# EAGLE board Landing Gear Layout (EAGLE 9.5.1)
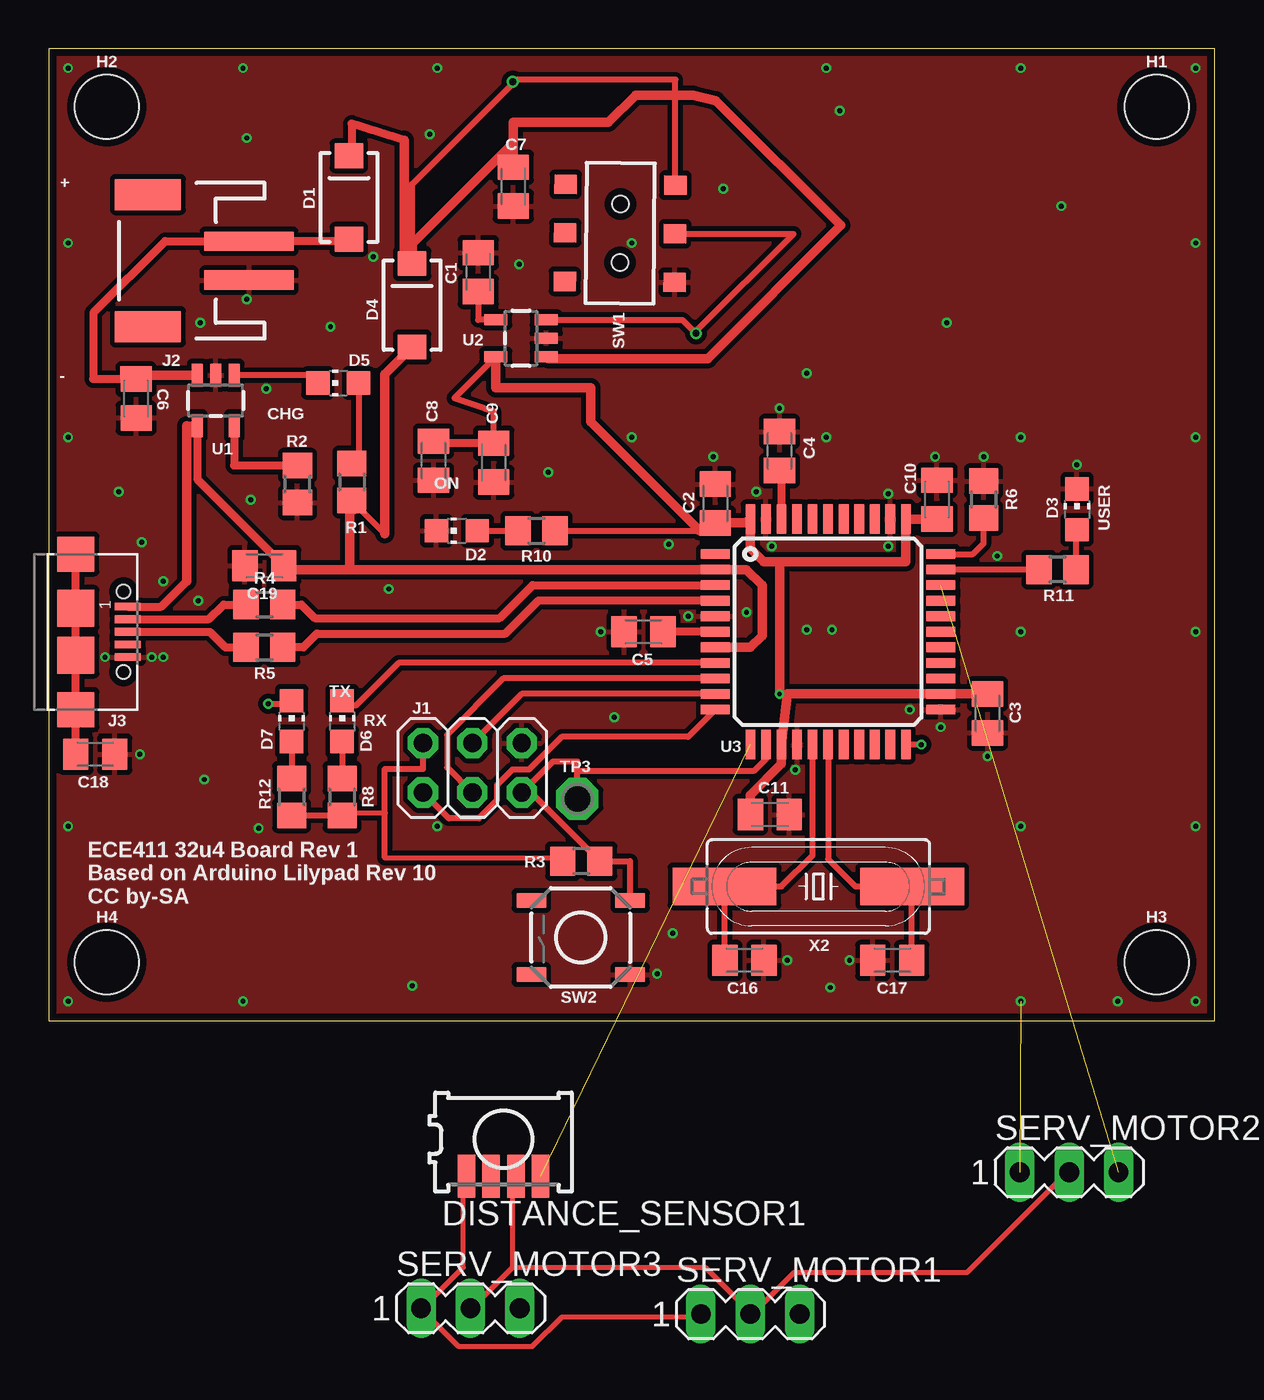
[diagram p0: board, top side]
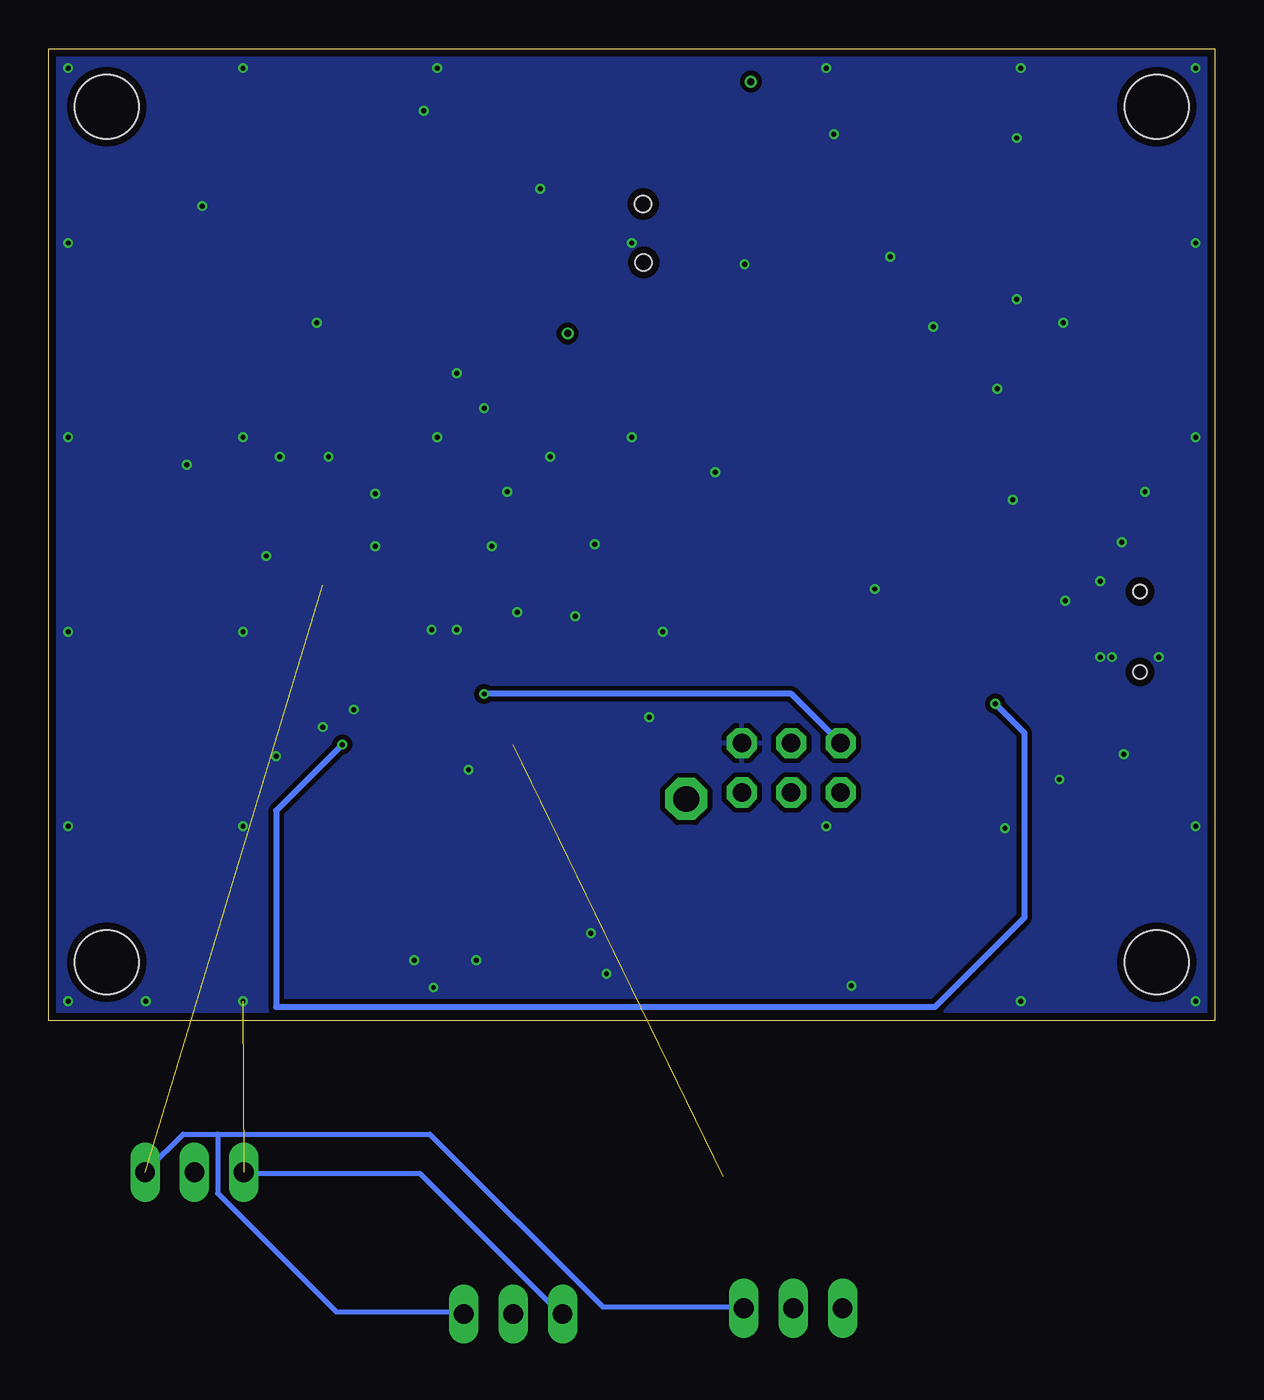
[diagram p1: board, bottom side, seen from below]

Size 60 x 50 mm. Coordinates in mm from the lower left corner, seen from the top.
Outline: 0,0 60,0 60,50 0,50 0,0
Copper layers (1*16): Top 0.035559375mm / dielectric 1.6mm / Bottom 0.035559375mm
Design rules "oshpark-2layer": minimum track width 6mil, minimum drill 10mil, track to track 6mil, track to pad 6mil, pad to pad 6mil, via to via 6mil, smd to smd 6mil, copper to edge 15mil, drill to drill 6mil, minimum pad ring 5mil, minimum via ring 5mil, stop-mask expansion 2.5mil, vias tented up to drill 0mil, thermal gap 10mil
Net classes: 0 default: width 0.254 mm, clearance 0.254 mm; 1 power: width 0.61 mm, drill 0.61 mm, clearance 0.254 mm

## Footprints (pad centres in the part's own frame; a part is rotated, then mirrored left to right if it is on the bottom)
C0805K = smd 1.3 x 1.6: 1 -1,0; 2 1,0
SMA-DIODE = smd 1.27 x 1.47: A -2.15,0; C 2.15,0
CHIP-LED0805 = smd 1.2 x 1.2: A 0,-1.05; C 0,1.05
TSSP6P38 = smd 0.9 x 2.2: 1 -1.905,-1.905; 2 -0.635,-1.905; 3 0.635,-1.905; 4 1.905,-1.905
STAND-OFF = hole 3.302: 0,0
2X03 = drill 0.95 pad 1.55 octagon: 1 -2.54,-1.27; 2 -2.54,1.27; 3 0,-1.27; 4 0,1.27; 5 2.54,-1.27; 6 2.54,1.27
JST-2-SMD = smd 1 x 4.6: 1 -1,-3.7; 2 1,-3.7 | smd 1.6 x 3.4: NC1 -3.4,1.5; NC2 3.4,1.5
629105136821 = smd 0.4 x 1.35: 1 -1.3,2.675; 2 -0.65,2.675; 3 0,2.675; 4 0.65,2.675; 5 1.3,2.675 | smd 1.8 x 1.9: SHELL -4,0; SHELL3 4,0 | smd 1.9 x 1.9: SHELL1 -1.2,0; SHELL2 1.2,0 | hole 0.7: -2.075,2.45; 2.075,2.45
R0805 = smd 1.3 x 1.5: 1 -0.95,0; 2 0.95,0
MA03-1 = drill 1.016 long: 1 -2.54,0; 2 0,0; 3 2.54,0
AYZ0202 = smd 1 x 1.15: 1 -2.5,2.825; 2 0,2.825; 3 2.5,2.825; 4 -2.5,-2.825; 5 0,-2.825; 6 2.5,-2.825 | hole 0.85: 1.5,0; -1.5,0
TACTILE_SWITCH_SMD = smd 1.524 x 0.762: 1 -2.54,1.905; 2 2.54,1.905; 3 -2.54,-1.905; 4 2.54,-1.905
P1-13 = drill 1.321 pad 2.159 octagon: TP 0,0
SOT23-5 = smd 0.55 x 1.2: 1 -0.95,-1.3; 2 0,-1.3; 3 0.95,-1.3; 4 0.95,1.3; 5 -0.95,1.3
TQFP44 = smd 1.5 x 0.5: 1 -5.8,4; 2 -5.8,3.2; 3 -5.8,2.4; 4 -5.8,1.6; 5 -5.8,0.8; 6 -5.8,0; 7 -5.8,-0.8; 8 -5.8,-1.6; 9 -5.8,-2.4; 10 -5.8,-3.2; 11 -5.8,-4; 23 5.8,-4; 24 5.8,-3.2; 25 5.8,-2.4; 26 5.8,-1.6; 27 5.8,-0.8; 28 5.8,0; 29 5.8,0.8; 30 5.8,1.6; 31 5.8,2.4; 32 5.8,3.2; 33 5.8,4 | smd 0.5 x 1.5: 12 -4,-5.8; 13 -3.2,-5.8; 14 -2.4,-5.8; 15 -1.6,-5.8; 16 -0.8,-5.8; 17 0,-5.8; 18 0.8,-5.8; 19 1.6,-5.8; 20 2.4,-5.8; 21 3.2,-5.8; 22 4,-5.8; 34 4,5.8; 35 3.2,5.8; 36 2.4,5.8; 37 1.6,5.8; 38 0.8,5.8; 39 0,5.8; 40 -0.8,5.8; 41 -1.6,5.8; 42 -2.4,5.8; 43 -3.2,5.8; 44 -4,5.8
HC49UP = smd 5.334 x 1.93: 1 -4.826,0; 2 4.826,0

## Placement (x,y rotation side)
C1  470p  [C0805K]  22.1,38.5 90 top
C2  100n  [C0805K]  34.3,26.6 90 top
C3  100n  [C0805K]  48.3,15.8 270 top
C4  100n  [C0805K]  37.6,29.3 90 top
C5  1u  [C0805K]  30.6,20 180 top
C6  4.7u  [C0805K]  4.5,32 270.2 top
C7  4.7u  [C0805K]  23.9,42.9 270 top
C8  4.7u  [C0805K]  19.8,28.8 270 top
C9  100n  [C0805K]  22.9,28.7 270 top
C10  100n  [C0805K]  45.7,26.8 90 top
C11  100n  [C0805K]  37.1,10.6 0 top
C16  30p  [C0805K]  35.8,3.1 0 top
C17  30p  [C0805K]  43.4,3.1 180 top
C18  100n  [C0805K]  2.4,13.7 0 top
C19  4.7u  [C0805K]  11.1,23.4 180 top
D1  B340A  [SMA-DIODE]  15.45,42.34 90 top
D2  GREEN  [CHIP-LED0805]  21,25.2 90 top
D3  GREEN  [CHIP-LED0805]  52.9,26.3 0 top
D4  B340A  [SMA-DIODE]  18.7,36.8 90 top
D5  GREEN  [CHIP-LED0805]  14.9,32.8 90 top
D6  GREEN  [CHIP-LED0805]  15.1,15.4 0 top
D7  GREEN  [CHIP-LED0805]  12.5,15.4 0 top
DISTANCE_SENSOR1  [TSSP6P38]  23.4,-6.1 0 top  (outside the outline)
H1  STAND-OFF  [STAND-OFF]  57,47 0 top
H2  STAND-OFF  [STAND-OFF]  3,47 0 top
H3  STAND-OFF  [STAND-OFF]  57,3 0 top
H4  STAND-OFF  [STAND-OFF]  3,3 0 top
J1  3x2 M  [2X03]  21.8,13 0 top
J2  S2B-PH-SM4-TB(LF)(SN)  [JST-2-SMD]  6.61,39.09 90 top
J3  629105136821  [629105136821]  1.4,20 270 top
R1  1K  [R0805]  15.6,27.7 270 top
R2  10K  [R0805]  12.8,27.6 90 top
R3  10K  [R0805]  27.4,8.2 180 top
R4  22  [R0805]  11.1,21.4 0 top
R5  22  [R0805]  11.1,19.2 0 top
R6  10K  [R0805]  48.1,26.8 270 top
R8  1K  [R0805]  15.1,11.5 270 top
R10  1K  [R0805]  25.1,25.2 0 top
R11  1K  [R0805]  51.9,23.2 180 top
R12  1K  [R0805]  12.5,11.5 270 top
SERV_MOTOR1  [MA03-1]  36.1,-15.1 0 top  (outside the outline)
SERV_MOTOR2  [MA03-1]  52.5,-7.8 0 top  (outside the outline)
SERV_MOTOR3  [MA03-1]  21.7,-14.8 0 top  (outside the outline)
SW1  AYZ0202AGRLC  [AYZ0202]  29.4,40.5 269.5 top
SW2  !RESET  [TACTILE_SWITCH_SMD]  27.37,4.27 180 top
TP3  TPPAD1-13  [P1-13]  27.2,11.4 0 top
U1  MCP73831  [SOT23-5]  8.6,31.9 180 top
U2  MIC5219  [SOT23-5]  24.3,35.1 90 top
U3  ATMEGA32U4-AUR  [TQFP44]  40.1,20 0 top
X2  16 MHz  [HC49UP]  39.6,6.9 0 top

## Library data of the parts
C1 = rcl; DESC: CAP CER 470PF 50V X7R 0805; MFR: Samsung; MPN: CL21B471KBANNNC; SPICEPREFIX: C
C2-C4 C9-C11 C18 = rcl; DESC: CAP CER 0.1UF 50V X7R 0805; MFR: Samsung; MPN: CL21B104KBCNNNC; SPICEPREFIX: C
C5 = rcl; DESC: CAP CER 1UF 16V X7R 0805; MFR: Samsung; MPN: CL21B105KOFNNNG; SPICEPREFIX: C
C6-C8 C19 = rcl; DESC: CAP CER 4.7UF 16V X5R 0805; MFR: Samsung; MPN: CL21A475KOFNNNE; SPICEPREFIX: C
C16 = rcl; DESC: CAP CER 30PF 50V C0G/NP0 0805; MFR: Samsung; MPN: CL21C300JBANNNC; SPICEPREFIX: C
C17 = rcl; DESC: CAP CER 30PF 50V C0G/NP0 0805; MFR: Samsung; MPN: CL21C180JBANNNC; SPICEPREFIX: C
D1 D4 = SparkFun-DiscreteSemi; DESC: DIODE SCHOTTKY 40V 2A SMA; MFR: Diodes Inc; MPN: B340AE-13
D2 D3 D5-D7 = led; DESC: LED GREEN CLEAR 0805 SMD; MFR: Würth Elektronik; MPN: 150080GS75000
DISTANCE_SENSOR1 = opto-vishay
H1-H4 = SparkFun-Hardware
J1 = SmartPrj; DESC: CONN HEADER VERT 6POS 2ROW 2.54MM; MFR: Harwin; MPN: M20-9980345
J2 = SparkFun-Connectors; DESC: CONN HEADER SMD R/A 2POS 2MM; MFR: JST; MPN: S2B-PH-SM4-TB(LF)(SN)
J3 = Wurth_Elektronik_Electromechanic_Input-Output_Connectors_rev19b; DESC: CONN RCPT USB2.0 MICRO B SMD R/A; MFR: Wurth; MPN: 629105136821
R1 R8 R10-R12 = rcl; DESC: RES SMD 1K OHM 1% 1/8W 0805; MFR: Yageo; MPN: RC0805FR-071KL; SPICEPREFIX: R
R2 R3 R6 = rcl; DESC: RES SMD 10K OHM 1% 1/8W 0805; MFR: Yageo; MPN: RC0805FR-0710KL; SPICEPREFIX: R
R4 R5 = rcl; DESC: RES SMD 22 OHM 1% 1/8W 0805; MFR: Yageo; MPN: RC0805FR-0722RL; SPICEPREFIX: R
SERV_MOTOR1-SERV_MOTOR3 = con-lstb; OC_FARNELL: unknown; OC_NEWARK: unknown
SW1 = SparkFun-Electromechanical; DESC: SWITCH SLIDE DPDT 100MA 12V; MFR: C&K; MPN: AYZ0202AGRLC
SW2 = SparkFun-Electromechanical; DESC: SWITCH TACTILE SPST-NO 0.05A 12V; MFR: C&K; MPN: RS-187R05A2-DS MT RT
TP3 = testpad
U1 = SparkFun-PowerIC; DESC: IC CONTROLLR LI-ION 4.2V SOT23-5; MFR: Microchip; MPN: MCP73831T-2ACI/OT; PROD_ID: IC-09995
U2 = SparkFun-PowerIC; DESC: IC REG LINEAR 3.3V 500MA SOT23-5; MFR: Microchip; MPN: MIC5219-3.3YM5-TR
U3 = SparkFun-IC-Microcontroller; DESC: IC MCU 8BIT 32KB FLASH 44TQFP; MFR: Microchip; MPN: ATMEGA32U4-AUR; PROD_ID: IC-10828; VALUE: 32U4
X2 = SparkFun-Clocks; DESC: CRYSTAL 16.000 MHZ 18PF SMD; MFR: ECS; MPN: ECS-160-18-5PX-TR

## Nets
3.3V: C2.1 C3.1 C8.1 C9.1 C10.1 C11.1 J1.2 R3.2 R8.2 R10.2 R12.2 U2.5 U3.14 U3.24 U3.34 U3.44
3.3V3: DISTANCE_SENSOR1.3 SERV_MOTOR1.2 SERV_MOTOR2.2 SERV_MOTOR3.2
!RESET: J1.5 R3.1 SW2.3 TP3.TP U3.13
AREF: C4.1 U3.42
D13#/USER_LED: R11.2 U3.32
D14/MISO: J1.1 U3.11
D15/SCK: J1.3 U3.9
D16/MOSI: J1.4 U3.10
D17/RX-LED: D6.C U3.8
D+: R5.2 U3.4
D-: R4.2 U3.3
GND: C1.2 C2.2 C3.2 C4.2 C5.2 C6.2 C7.2 C8.2 C9.2 C10.2 C11.2 C16.2 C17.2 C18.2 C19.2 D2.C D3.C DISTANCE_SENSOR1.1 J1.6 J2.1 J3.5 R2.1 R6.1 SERV_MOTOR1.1 SERV_MOTOR2.1 SERV_MOTOR3.1 SW1.3 SW2.1 U1.2 U2.2 U3.5 U3.15 U3.23 U3.35 U3.43
GND1: SERV_MOTOR1.3 SERV_MOTOR2.3 SERV_MOTOR3.3 U3.31
MCPPROG: R2.2 U1.5
MIC-BP: C1.1 U2.4
MIC-EN: SW1.2 U2.3
N$1: DISTANCE_SENSOR1.4 U3.12
N$3: D5.A R1.1
N$4: D5.C U1.1
N$5: U3.21
N$7: D2.A R10.1
N$13: D3.A R11.1
N$14: C18.1 J3.SHELL J3.SHELL1 J3.SHELL2 J3.SHELL3
N$15: D6.A R8.1
N$16: D7.A R12.1
N$19: J3.2 R4.1
N$20: J3.3 R5.1
PE2/!HWB: R6.2 U3.33
PWRIN: C7.1 D1.C D4.C SW1.1 U2.1
TX_LED: D7.C U3.22
UCAP: C5.1 U3.6
V_BATT: C6.1 D1.A J2.2 U1.3
VBUS: C19.1 D4.A J3.1 R1.2 U1.4 U3.2 U3.7
XTAL1: C17.1 U3.17 X2.2
XTAL2: C16.1 U3.16 X2.1

## Tracks (layer width: path | path; a pad name or v marks a point on that pad's centre or on a via)
3.3V  (via drill 0.25)
  Top 0.254: 17.3,8.38 26.42,8.38 R3.2 | 17.3,10.67 15.24,10.67 R8.2 | v37.6,16.8 37.85,16.76 37.99,16.75
  Top 0.3: J1.2 19.26,12.95 17.3,12.95 17.3,10.67 17.3,8.38 | U2.5 20.87,32.02 22.9,31.33 C9.1 | R10.2 33.5,25.2 33.9,25.2 | R12.2 R8.2
  Top 0.4: C8.1 19.8,29.7 C9.1
  Top 0.5: C11.1 36.1,11.6 37.7,13.2 U3.14 37.99,16.75 38,16.8 U3.24 C3.1 | C10.1 U3.34 44.1,23.6 37.6,23.6 | 37.6,23.6 36.8,23.6 36.1,24.3 U3.44 35.9,25.6 C2.1 33.9,25.2 | 33.5,25.2 27.9,30.8 27.9,32.55 23,32.55 U2.5 | v37.6,16.8 37.6,23.6
  Bottom 0.3: J1.2 21.79,16.8 v37.6,16.8
3.3V3
  Top 0.254: 23.88,-12.7 23.88,-8.13 DISTANCE_SENSOR1.3 | 23.88,-12.7 21.84,-14.73 SERV_MOTOR3.2 | 23.88,-12.7 33.78,-12.7 36.07,-14.99 SERV_MOTOR1.2 36.32,-14.99 38.35,-12.95 47.24,-12.95 52.32,-7.87 SERV_MOTOR2.2
!RESET
  Top 0.3: U3.13 36.9,13.45 36.27,12.83 27.2,12.83 | SW2.3 29.91,8.2 R3.1 24.85,11.7 24.31,11.7 J1.5 25.94,13.33 27.2,13.33 27.2,12.83 | TP3.TP 27.2,12.83
AREF
  Top 0.4: C4.1 37.7,28.2 U3.42
D13#/USER_LED
  Top 0.3: R11.2 U3.32
D14/MISO
  Top 0.3: U3.11 32.9,14.6 26.4,14.6 24.71,12.91 23.85,12.91 23.06,12.12 23.06,11.32 22.14,10.4 20.59,10.4 J1.1
D15/SCK
  Top 0.3: U3.9 23.4,17.6 20.5,14.7 20.5,13.03 J1.3
D16/MOSI
  Top 0.3: U3.10 24.33,16.8 J1.4
D17/RX-LED
  Top 0.3: U3.8 18,18.4 15.8,16.2 15.35,16.2 D6.C
D+
  Top 0.4: U3.4 25.2,21.6 23.5,19.9 | 13.8,19.9 13.1,19.2 R5.2
  Top 0.406: 13.8,19.9 23.5,19.9
D-
  Top 0.4: R4.2 13,21.4 13.7,20.7 23.2,20.7 24.9,22.4 U3.3
GND  (via drill 0.25)  (1 unrouted)
  Top 0.254: DISTANCE_SENSOR1.1 21.34,-8.13 21.34,-12.7 19.3,-14.73 SERV_MOTOR3.1 19.3,-14.99 21.08,-16.76 24.89,-16.76 26.42,-15.24 33.53,-15.24 SERV_MOTOR1.1
  Bottom 0.254: SERV_MOTOR2.1 49.78,-7.87 40.89,-7.87 33.78,-14.99 SERV_MOTOR1.1
  other vias: 40.3,20.1 17.5,22.2 35.9,21 32.9,20.8 39,20.1 44.3,16 45.9,15.1 43.2,27.1 43.2,24.4 37.2,24.4 36.4,27.2 10.4,26.8 5.3,18.7 2.9,18.7 5.9,18.7 7.7,21.6 5.9,22.6 4.8,24.6 3.6,27.2 11.2,32.5 10.2,37.1 7.8,35.9 16.7,39.3 39,33.3 24.2,38.9 46.2,35.9 14.5,35.7 19.6,45.6 25.7,28.2 28.4,20 31.3,2.4 38,3.1 41.2,3.1 38.4,12.9 48.3,13.6 52.9,28.6 48.1,29 45.6,29 37.6,31.5 34.2,29 4.7,13.7 1,49 59,49 59,1 1,1 1,10 1,30 10,49 20,49 40.7,46.8 40,49 50,49 59,40 59,30 59,20 59,10 55,1 50,1 40.2,1.7 32.1,4.5 18.7,1.8 10,1 29.1,15.6 8,12.4 31.9,24.5 30,40 52.1,41.9 48.8,23.9 50,10 50,20 10.8,9.9 20,10 34.7,42.8 50,30 40,30 30,30 10.2,45.4 1,40
  pour Top: 0,0 60,0 60,50 0,50
  pour Bottom: -1.8,-1.9 62,-1.9 62,51.5 -1.8,51.5
GND1  (1 unrouted)
  Bottom 0.254: 51.31,-5.84 53.09,-5.84 54.86,-7.62 SERV_MOTOR2.3 | 51.31,-5.84 40.39,-5.84 31.5,-14.73 24.38,-14.73 SERV_MOTOR3.3 | 51.31,-5.84 51.31,-8.89 45.21,-14.99 38.86,-14.99 SERV_MOTOR1.3
MCPPROG
  Top 0.4: U1.5 9.55,28.55 R2.2
MIC-BP
  Top 0.3: C1.1 22.1,36.05 U2.4
MIC-EN  (via drill 0.35)
  Top 0.3: SW1.2 38.33,40.48 33.3,35.45 v33.3,35.35 32.6,36.05 U2.3
N$1  (1 unrouted)
N$3
  Top 0.3: R1.1 15.95,29 D5.A
N$4
  Top 0.3: D5.C 13.45,33.2 U1.1
N$7
  Top 0.3: D2.A R10.1
N$13
  Top 0.3: R11.1 D3.A
N$14
  Top 0.4: C18.1 J3.SHELL3 J3.SHELL2 J3.SHELL1 J3.SHELL
N$15
  Top 0.3: D6.A R8.1
N$16
  Top 0.3: D7.A 12.5,13.05 12.55,13 12.5,12.95 R12.1
N$19
  Top 0.4: J3.2 8.25,20.65 9,21.4 R4.1
N$20
  Top 0.4: J3.3 8.3,20 9.1,19.2 R5.1
PE2/!HWB
  Top 0.3: U3.33 47.55,24 48.1,24.55 R6.2
PWRIN  (via drill 0.35)
  Top 0.3: D4.C 18.7,43.02 23.88,48.2 v23.88,48.3 23.98,48.4 32.25,48.4 SW1.1
  Top 0.4: D1.C 15.59,44.63 15.59,46.14 18.3,45.28
  Top 0.5: 18.3,45.28 18.3,39.35 D4.C 18.7,39.95 23.9,45.15 C7.1 23.9,46.2 28.8,46.2 30.2,47.6 33.16,47.6 34.33,47.32 40.75,40.9 33.9,34.05 25.7,34.05 U2.1
TX_LED  (via drill 0.25)
  Top 0.3: v44.9,14.2 U3.22 | v11.3,16.3 12.35,16.3 D7.C
  Bottom 0.3: v44.9,14.2 48.3,10.8 48.3,0.7 14.4,0.7 9.8,5.3 9.8,14.8 v11.3,16.3
UCAP
  Top 0.4: U3.6 C5.1
V_BATT
  Top 0.4: C6.1 2.29,33 2.3,33.01 2.3,36.4 5.99,40.09 J2.2 15.39,40.09 D1.A
  Top 0.5: U1.3 4.54,33.2 C6.1
VBUS
  Top 0.254: 15.5,23.3 15.49,23.37 15.49,23.2 | 15.5,26.16 15.75,26.16 15.75,26.42 R1.2
  Top 0.3: R1.2 17.3,25.05
  Top 0.4: J3.1 5.8,21.3 7.1,22.6 | C19.1 7.65,27.85 U1.4 7.1,30.6
  Top 0.5: U3.7 36.1,19.2 36.7,19.8 36.7,22.4 35.9,23.2 U3.2 15.49,23.2 12.3,23.2 C19.1 | 7.1,22.6 7.1,30.6 | D4.A 17.3,33.25 17.3,25.05 | 15.5,26.16 15.5,23.3
XTAL1
  Top 0.3: U3.17 40.1,8.3 41.5,6.9 X2.2 44.4,6.87 C17.1
XTAL2
  Top 0.3: U3.16 39.3,8.5 37.7,6.9 X2.1 34.77,3.13 C16.1

## Text on the board
tPlace: + | - | CHG | ON | USER | TX | RX | ECE411 32u4 Board Rev 1 / Based on Arduino Lilypad Rev 10 / CC by-SA